# EAGLE board MEGA_BASED_WATER_ANALYZER (EAGLE 9.6.2)
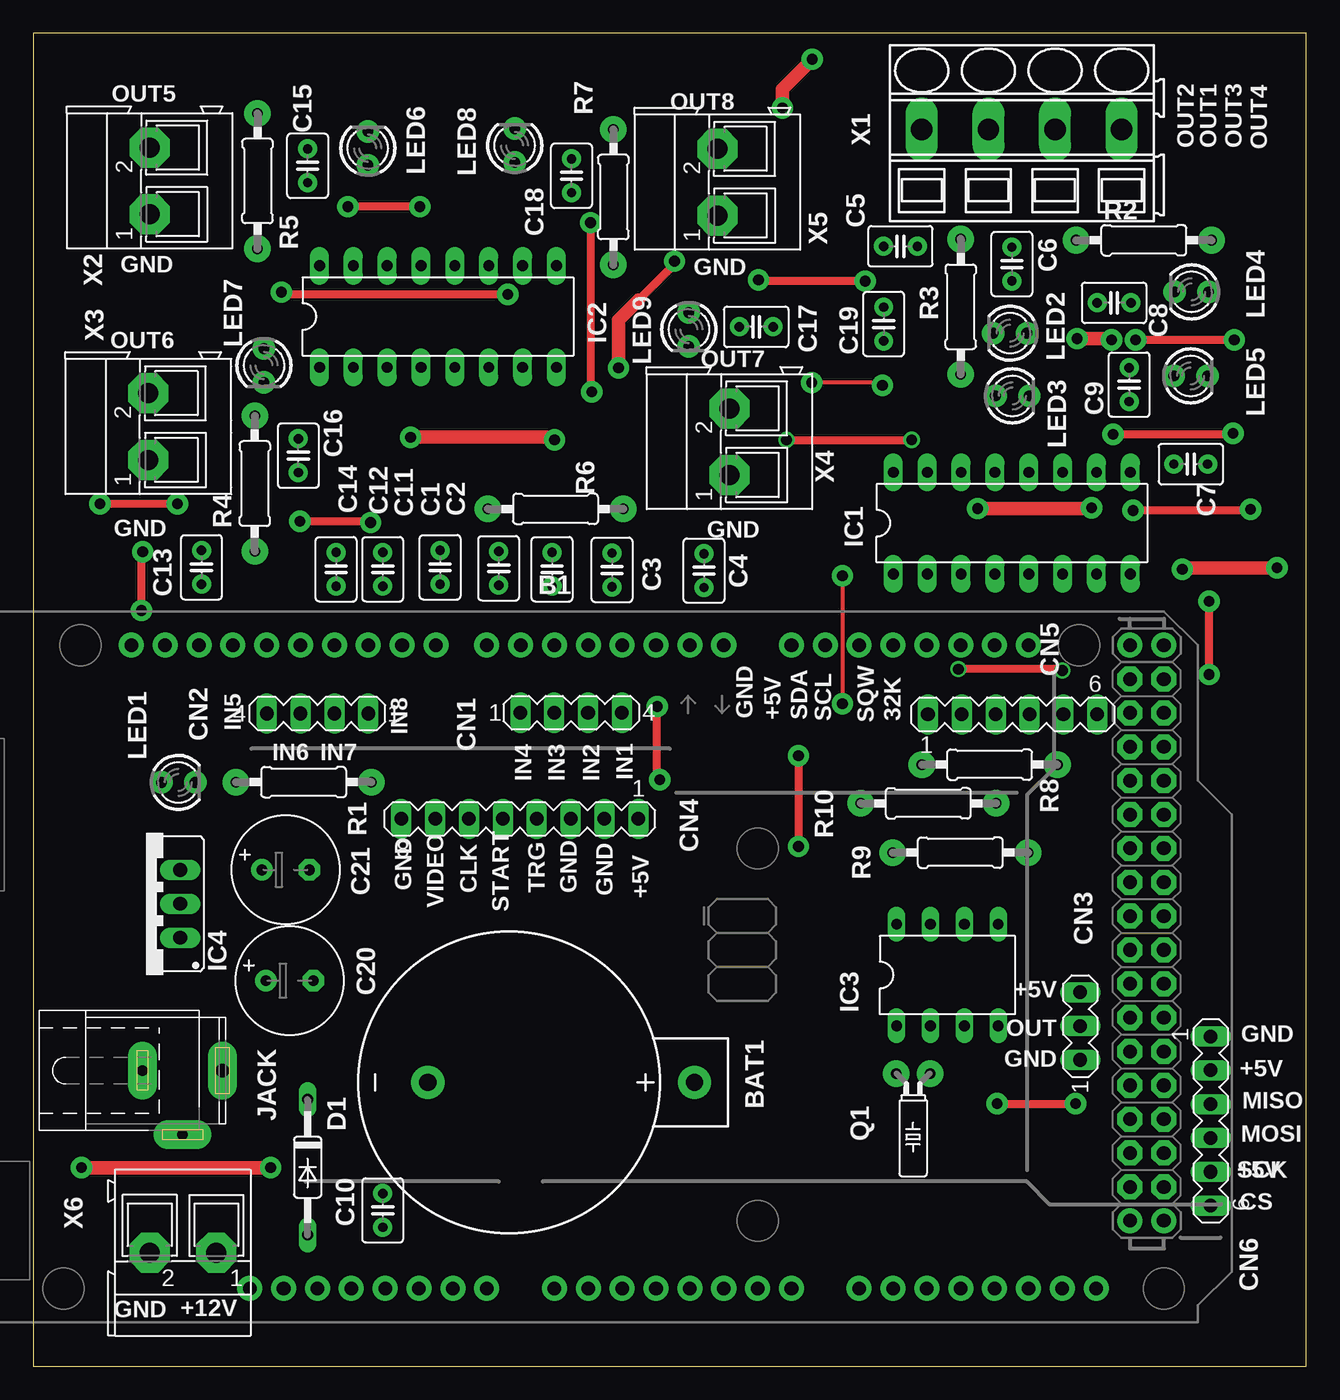
[diagram p0: board, top side]
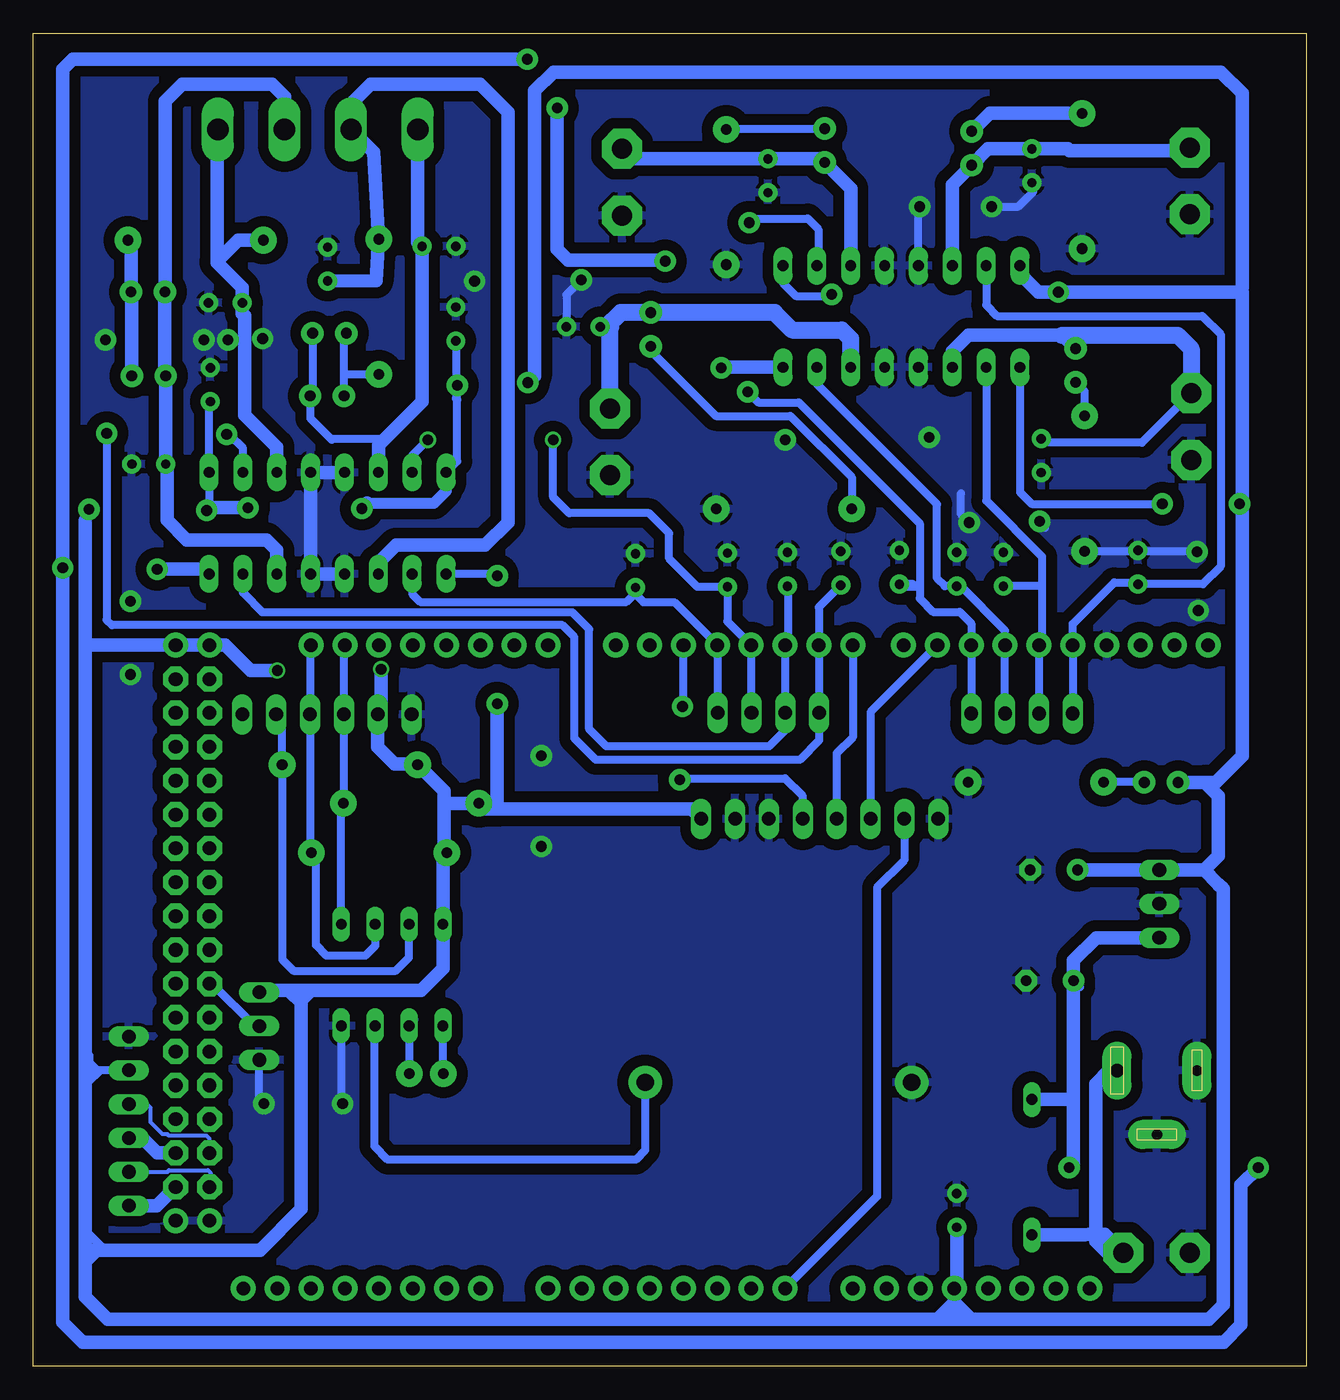
[diagram p1: board, bottom side, seen from below]

Size 95.5 x 100 mm. Coordinates in mm from the lower left corner, seen from the top.
Outline: 0,0 95.5,0 95.5,100 0,100 0,0
Copper layers (1*16): Top 0.035mm / dielectric 1.5mm / Bottom 0.035mm
Design rules "default": minimum track width 6mil, minimum drill 0.35mm, track to track 6mil, track to pad 6mil, pad to pad 6mil, via to via 6mil, smd to smd 6mil, copper to edge 40mil, drill to drill 6mil, minimum pad ring 10mil, minimum via ring 8mil, stop-mask expansion 4mil, vias tented up to drill 0mil, thermal gap 10mil

## Footprints (pad centres in the part's own frame; a part is rotated, then mirrored left to right if it is on the bottom)
ARDUINO_MEGA_NO_SILK = drill 1.016 pad 1.88: 0 13.97,24.13; 1 11.43,24.13; 2 8.89,24.13; 3 6.35,24.13; 3.3V -13.97,-24.13; 4 3.81,24.13; 5 1.27,24.13; 5V -11.43,-24.13; 5V@1 44.45,24.13; 5V@2 46.99,24.13; 6 -1.27,24.13; 7 -3.81,24.13; 8 -7.62,24.13; 9 -10.16,24.13; 10 -12.7,24.13; 11 -15.24,24.13; 12 -17.78,24.13; 13 -20.32,24.13; 14 19.05,24.13; 15 21.59,24.13; 16 24.13,24.13; 17 26.67,24.13; 18 29.21,24.13; 19 31.75,24.13; 20 34.29,24.13; 21 36.83,24.13; A0 1.27,-24.13; A1 3.81,-24.13; A2 6.35,-24.13; A3 8.89,-24.13; A4 11.43,-24.13; A5 13.97,-24.13; A6 16.51,-24.13; A7 19.05,-24.13; A8 24.13,-24.13; A9 26.67,-24.13; A10 29.21,-24.13; A11 31.75,-24.13; A12 34.29,-24.13; A13 36.83,-24.13; A14 39.37,-24.13; A15 41.91,-24.13; AREF -25.4,24.13; GND -8.89,-24.13; GND@1 -6.35,-24.13; GND@2 44.45,-19.05; GND@3 46.99,-19.05; GND@4 -22.86,24.13; IOREF -19.05,-24.13; NC -21.59,-24.13; RESET -16.51,-24.13; SCL -30.48,24.13; SDA -27.94,24.13; VIN -3.81,-24.13 | drill 1.016 pad 1.88 octagon: 22 44.45,21.59; 23 46.99,21.59; 24 44.45,19.05; 25 46.99,19.05; 26 44.45,16.51; 27 46.99,16.51; 28 44.45,13.97; 29 46.99,13.97; 30 44.45,11.43; 31 46.99,11.43; 32 44.45,8.89; 33 46.99,8.89; 34 44.45,6.35; 35 46.99,6.35; 36 44.45,3.81; 37 46.99,3.81; 38 44.45,1.27; 39 46.99,1.27; 40 44.45,-1.27; 41 46.99,-1.27; 42 44.45,-3.81; 43 46.99,-3.81; 44 44.45,-6.35; 45 46.99,-6.35; 46 44.45,-8.89; 47 46.99,-8.89; 48 44.45,-11.43; 49 46.99,-11.43; 50 44.45,-13.97; 51 46.99,-13.97; 52 44.45,-16.51; 53 46.99,-16.51
SN2032 = drill 1.3 pad 2.5: + 0,13.9; - 0,-6.1
C025-030X050 = drill 0.7 pad 1.422: 1 -1.27,0; 2 1.27,0
E3,5-8 = drill 0.813 pad 1.6: + -1.778,0 | drill 0.813 pad 1.6 octagon: - 1.778,0
MA04-1 = drill 1.016 long: 1 -3.81,0; 2 -1.27,0; 3 1.27,0; 4 3.81,0
MA03-1 = drill 1.016 long: 1 -2.54,0; 2 0,0; 3 2.54,0
MA08-1 = drill 1.016 long: 1 -8.89,0; 2 -6.35,0; 3 -3.81,0; 4 -1.27,0; 5 1.27,0; 6 3.81,0; 7 6.35,0; 8 8.89,0
MA06-1 = drill 1.016 long: 1 -6.35,0; 2 -3.81,0; 3 -1.27,0; 4 1.27,0; 5 3.81,0; 6 6.35,0
DO35-10 = drill 0.813 long: A 5.08,0; C -5.08,0
DIL16 = drill 0.813 pad 1.422 long: 1 -8.89,-3.81; 2 -6.35,-3.81; 3 -3.81,-3.81; 4 -1.27,-3.81; 5 1.27,-3.81; 6 3.81,-3.81; 7 6.35,-3.81; 8 8.89,-3.81; 9 8.89,3.81; 10 6.35,3.81; 11 3.81,3.81; 12 1.27,3.81; 13 -1.27,3.81; 14 -3.81,3.81; 15 -6.35,3.81; 16 -8.89,3.81
DIL08 = drill 0.813 long: 1 -3.81,-3.81; 2 -1.27,-3.81; 3 1.27,-3.81; 4 3.81,-3.81; 5 3.81,3.81; 6 1.27,3.81; 7 -1.27,3.81; 8 -3.81,3.81
78XXS = drill 1.016 long: GND 0,-2.54; IN -2.54,-2.54; OUT 2.54,-2.54
SPC4077 = drill 0.8 pad 2.184 long: 1 -3,0; 2 0,-4.8 | drill 1 pad 2.184 long: 3 3,0
LED3MM = drill 0.813 pad 1.676: A -1.27,0; K 1.27,0
TC26H = drill 0.8 pad 2: 1 -1.27,0; 2 1.27,0
0207/10 = drill 0.8 pad 2: 1 -5.08,0; 2 5.08,0
SMKDSP_1,5/4 = drill 1.6 pad 1.8 long: 1 -2.5,0; 2 2.5,0; 3 7.5,0; 4 12.5,0
AK300/2 = drill 1.5 pad 3 octagon: 1 -2.515,0; 2 2.489,0

## Placement (x,y rotation side)
B1  ARDUINO_MEGA_R3FULL  [ARDUINO_MEGA_NO_SILK]  37.83,29.96 0 top
BAT1  coin cell 2032  [SN2032]  35.7,21.3 270 top
C1  0.01uf  [C025-030X050]  34.92,59.86 90 top
C2  0.01uf  [C025-030X050]  38.92,59.79 90 top
C3  0.01uf  [C025-030X050]  43.42,59.74 90 top
C4  0.01uf  [C025-030X050]  50.32,59.69 90 top
C5  0.01uf  [C025-030X050]  65.06,84.02 180 top
C6  0.01uf  [C025-030X050]  73.42,82.69 90 top
C7  0.01uf  [C025-030X050]  86.84,67.68 0 top
C8  0.01uf  [C025-030X050]  81.09,79.78 0 top
C9  0.01uf  [C025-030X050]  82.22,73.64 90 top
C10  0.01uf  [C025-030X050]  26.22,11.69 90 top
C11  0.01uf  [C025-030X050]  30.52,59.94 90 top
C12  0.01uf  [C025-030X050]  26.22,59.79 90 top
C13  0.01uf  [C025-030X050]  12.62,59.94 90 top
C14  0.01uf  [C025-030X050]  22.72,59.79 90 top
C15  0.01uf  [C025-030X050]  20.58,90.06 270 top
C16  0.01uf  [C025-030X050]  19.88,68.31 270 top
C17  0.01uf  [C025-030X050]  54.24,77.98 0 top
C18  0.01uf  [C025-030X050]  40.38,89.31 270 top
C19  0.01uf  [C025-030X050]  63.8,78.19 90 top
C20  33uf/50V  [E3,5-8]  19.23,28.93 0 top
C21  10uf/25V  [E3,5-8]  18.93,37.24 0 top
CN1  Male berg strip  [MA04-1]  40.35,49.03 0 top
CN2  Male berg strip  [MA04-1]  21.32,48.97 180 top
CN3  Female berg strip  [MA03-1]  78.55,25.52 90 top
CN4  female berg strip  [MA08-1]  36.5,41.06 180 top
CN5  Female berg strip  [MA06-1]  73.47,48.9 0 top
CN6  Female berg strip  [MA06-1]  88.34,18.39 270 top
D1  1N4446  [DO35-10]  20.58,14.93 270 top
IC1  L293E  [DIL16]  73.42,63.25 0 top
IC2  L293E  [DIL16]  30.36,78.75 0 top
IC3  DS1307  [DIL08]  68.58,29.35 0 top
IC4  IC7805  [78XXS]  8.48,34.69 90 top
JACK  DC jack  [SPC4077]  11.19,22.18 0 top
LED1  RED  [LED3MM]  10.88,43.8 0 top
LED2  RED  [LED3MM]  73.28,77.5 180 top
LED3  YELLOW  [LED3MM]  73.46,72.8 0 top
LED4  YELLOW  [LED3MM]  86.9,80.6 180 top
LED5  RED  [LED3MM]  86.84,74.3 0 top
LED6  BLUE  [LED3MM]  25.1,91.38 90 top
LED7  BLUE  [LED3MM]  17.3,75.08 270 top
LED8  GREEN  [LED3MM]  36.12,91.58 90 top
LED9  GREEN  [LED3MM]  49.18,77.78 270 top
Q1  32.786kHz  [TC26H]  66.01,21.96 180 top
R1  4.7K  [0207/10]  20.28,43.82 180 top
R2  10k  [0207/10]  83.32,84.48 0 top
R3  10k  [0207/10]  69.58,79.48 270 top
R4  10k  [0207/10]  16.62,66.22 90 top
R5  10k  [0207/10]  16.82,88.92 90 top
R6  10k  [0207/10]  39.18,64.32 180 top
R7  10k  [0207/10]  43.52,87.72 90 top
R8  10k  [0207/10]  71.75,45.13 0 top
R9  10k  [0207/10]  69.55,38.53 0 top
R10  10k  [0207/10]  67.15,42.23 0 top
X1  4Pin Screw Terminal  [SMKDSP_1,5/4]  69.16,92.8 0 top
X2  2 pin Screw Terminal  [AK300/2]  8.73,88.93 90 top
X3  2 Pin Screw Terminal  [AK300/2]  8.63,70.5 90 top
X4  2 Pin Screw Terminal  [AK300/2]  52.23,69.37 90 top
X5  2 Pin Screw Terminal  [AK300/2]  51.33,88.84 90 top
X6  2 pin Screw Terminal  [AK300/2]  11.22,8.52 180 top

## Library data of the parts
B1 = SparkFun-Boards
BAT1 = sn2032
C1-C19 R1-R10 = rcl
C20 C21 = rcl; SPICEPREFIX: C
CN1-CN6 = con-lstb; OC_FARNELL: unknown; OC_NEWARK: unknown
D1 = diode
IC1 IC2 = texas; MF: Arrow Electronics; MPN: L293E; OC_FARNELL: 1467711; OC_NEWARK: 89K0732
IC3 = ic-package
IC4 = v-reg
JACK = con-jack; OC_FARNELL: unknown; OC_NEWARK: unknown
LED1-LED9 = led
Q1 = crystal; OC_FARNELL: unknown; OC_NEWARK: unknown
X1 = con-phoenix-smkdsp; MF: FARNELL; MPN: 1733596; OC_FARNELL: 3041268; OC_NEWARK: 71C4131
X2-X6 = con-ptr500; OC_FARNELL: unknown; OC_NEWARK: unknown

## Nets
32K: CN5.6
+5V: B1.5V B1.5V@1 B1.5V@2 C9.1 C10.1 C19.1 C21.+ CN3.3 CN4.1 CN5.2 CN6.2 IC1.1 IC1.9 IC1.16 IC2.1 IC2.9 IC2.16 IC3.8 IC4.OUT LED1.A R8.1 R9.1 R10.1
+12V: C20.+ D1.C IC1.8 IC2.8 IC4.IN
CLK: B1.9 CN4.6
CS: B1.53 CN6.6
DGND: B1.GND B1.GND@2 B1.GND@3 B1.GND@4 BAT1.- C1.2 C2.2 C3.2 C4.2 C5.2 C6.2 C7.2 C8.2 C9.2 C10.2 C11.2 C12.2 C13.2 C14.2 C15.2 C16.2 C17.2 C18.2 C19.2 C20.- C21.- CN3.1 CN4.2 CN4.3 CN4.8 CN5.1 CN6.1 IC1.4 IC1.5 IC1.12 IC1.13 IC2.4 IC2.5 IC2.12 IC2.13 IC3.4 IC4.GND JACK.1 JACK.2 R1.1 R4.1 R5.1 R6.1 R7.1 X2.1 X3.1 X4.1 X5.1 X6.2
IN1: B1.3 C4.1 CN1.4 IC1.2
IN2: B1.4 C3.1 CN1.3 IC1.15
IN3: B1.5 C2.1 CN1.2 IC1.7
IN4: B1.6 C1.1 CN1.1 IC1.10
IN5: B1.13 C13.1 CN2.4 IC2.15
IN6: B1.12 C14.1 CN2.3 IC2.2
IN7: B1.11 C12.1 CN2.2 IC2.7
IN8: B1.10 C11.1 CN2.1 IC2.10
IN+: D1.A JACK.3 X6.1
MISO: B1.50 CN6.3
MOSI: B1.51 CN6.4
N$1: IC3.1 Q1.2
N$2: IC3.2 Q1.1
N$3: C6.1 IC1.3 R3.1 X1.2
N$5: BAT1.+ IC3.3
N$8: C8.1 IC1.11 R2.1 X1.4
N$11: LED1.K R1.2
N$12: LED4.A LED5.K R2.2
N$13: LED2.K LED3.A R3.2
N$14: C7.1 IC1.6 LED4.K LED5.A X1.3
N$17: C16.1 IC2.3 LED7.A X3.2
N$20: C18.1 IC2.11 LED8.A X5.2
N$22: LED7.K R4.2
N$23: LED6.K R5.2
N$24: C17.1 IC2.6 LED9.A X4.2
N$25: C15.1 IC2.14 LED6.A X2.2
N$27: LED9.K R6.2
N$29: LED8.K R7.2
N$31: C5.1 IC1.14 LED2.A LED3.K X1.1
OUT: B1.40 CN3.2
SCK: B1.52 CN6.5
SCL: B1.21 CN5.4 IC3.6 R9.2
SDA: B1.20 CN5.3 IC3.5 R10.2
SQW: CN5.5 IC3.7 R8.2
START: B1.7 CN4.5
TRG: B1.2 CN4.4
VIDEO: B1.A0 CN4.7

## Tracks (layer width: path | path; a pad name or v marks a point on that pad's centre or on a via)
+5V  (via drill 0.8, 0.8 pad 1.6)
  Top 0.305: 60.7,59.4 v60.7,59.3 v60.7,49.7 | v63.7,73.6 63.5,73.8 v58.4,73.8
  Top 0.61: v10.8,64.7 v5,64.7 | v77.2,52.2 77.1,52.3 v69.4,52.3 | 79.35,64.35 v79.4,64.4 | v35.6,80.4 18.78,80.4 v18.6,80.58 | v82.5,64.2 91.22,64.2 v91.32,64.3
  Top 1.016: v70.85,64.35 79.35,64.35
  Bottom 0.305: 63.7,72.5 v63.7,73.6
  Bottom 0.61: C21.+ | 6.62,36.2 6.62,36.3 | 64.77,38.23 R9.1 64.7,38.76 | 21.47,81.96 IC2.16 21.56,82.47 | IC2.1 21.47,65.57 20.6,64.7 v10.8,64.7 | CN6.2 90.5,22.2 | 90.5,22.2 90.7,22.2 | 90.7,22.2 91.6,22.2 | 75.4,27.9 75.7,28.2 | 79.1,28.2 78.96,28.06 CN3.3 | R8.1 66.74,45.2 | 91.31,54.09 91.6,53.8 | v63.7,73.6 63.7,67.89 IC1.16 64.53,65.67 | C19.1 63.8,72.6 63.7,72.5 | 69.4,49.16 CN5.2 | IC1.9 82.31,64.4 | IC2.9 39.25,81.25 38.3,80.3 35.7,80.3 v35.6,80.4 | IC1.9 82.31,71.7 82.37,72.22 C9.1 | 64.7,42.3 64.63,42.23 | 60.7,41.9 60.6,41.8 | IC1.1 60.84,59.44 v60.7,59.3 | IC1.9 82.31,64.39 v82.5,64.2 | 91.6,63.46 91.32,63.74 v91.32,64.3 | 91.5,7.7 90.5,8.7 90.3,8.7 | 76.4,28.2 76.4,28 75.5,27.1 | 75.4,27.2 74.4,28.2 73.8,28.2 | 91.3,23.3 91.3,22.8 90.7,22.2 | 91.4,21.3 90.5,22.2 | 28.5,3.52 24.5,3.52
  Bottom 0.813: 70.45,64.75 65.45,64.75 64.53,65.67
  Bottom 1.016: C21.+ IC4.OUT 7.65,37.23 | 7.65,37.23 6.62,36.2 6.22,35.8 6.22,4.6 7.3,3.52 24.5,3.52 26.3,3.52 | B1.5V 26.4,3.52 28.5,3.52 89.9,3.52 91.6,5.22 91.6,8.7 | 64.77,38.23 IC3.8 64.77,29.83 66.4,28.2 73.8,28.2 75.7,28.2 76.4,28.2 79.1,28.2 | R8.1 64.7,43.16 64.7,42.3 64.7,38.76 | 91.6,63.46 91.6,53.8 91.6,22.2 91.6,8.7 | 21.47,81.96 20.09,80.58 v18.6,80.58 4.8,80.58 4.8,64.9 v5,64.7 4.8,64.5 4.8,45.8 6.8,43.8 7.6,43.8 | 91.6,8.7 90.3,8.7 78.5,8.7 75.4,11.8 75.4,27.2 75.4,27.9 | CN4.1 46.13,41.8 60.6,41.8 61.64,41.8 R10.1 64.63,42.23 | 66.74,45.2 68.4,45.2 69.66,46.46 CN5.2 | 91.31,54.09 B1.5V@2 B1.5V@1 81.09,54.09 79.2,52.2 v77.2,52.2 | 4.8,80.9 4.8,95.5 6.4,97.1 56.49,97.1 57.9,95.69 57.9,74.3 v58.4,73.8 | v69.4,52.3 69.4,49.16 | 70.45,64.75 v70.85,64.35 | 82.31,64.4 v79.4,64.4 | v60.7,49.7 60.7,41.9 | 26.4,4.8 25.2,3.6 | B1.5V 26.4,4.8 | 27.6,3.6 26.4,4.8 | B1.5V 26.22,6.01 C10.1 | LED1.A 7.6,43.8 | 7.65,37.23 6.6,38.28 6.6,42.8 7.6,43.8
+12V  (via drill 0.8 pad 1.6)
  Top 0.61: 45.4,80 48.1,82.7
  Top 1.016: v17.8,14.9 v3.6,14.9 | v93.3,59.9 86.3,59.9 v86.2,59.8 | v43.9,74.9 43.9,78.5 45.4,80 | 48.1,82.7 v48.1,82.9 | v56.2,94.4 56.2,95.82 v58.44,98.06
  Bottom 0.61: C20.+ 16.96,28.44
  Bottom 1.016: 11.2,31.97 IC4.IN 15.75,32.15 17.45,30.45 C20.+ 17.45,20.1 | v3.6,14.9 4.9,13.6 4.9,3.1 6.2,1.8 91.8,1.8 93.3,3.3 v93.3,59.9 93.3,97.3 92.54,98.06 v58.44,98.06 | v86.2,59.8 82.67,59.8 IC1.8 | IC2.8 43.74,74.94 43.8,75 v43.9,74.9 | v48.1,82.9 48.2,83 55.4,83 56.2,83.8 v56.2,94.4 | 17.45,20.1 17.45,15.25 v17.8,14.9 | D1.C 17.54,20.01 17.45,20.1
CLK
  Bottom 0.61: B1.9 32.69,49.07 CN4.6
CS
  Bottom 1.016: B1.53 86.23,12.04 CN6.6
DGND  (via drill 0.8 pad 1.6)
  Top 0.61: v8.2,61.1 8.1,61 v8.1,56.7 | v29,87 v23.6,87 | v62.4,81.4 54.5,81.4 v54.4,81.5 | v88.2,57.4 v88.2,51.9 | v90.1,77 v82.7,77 | v57.4,45.8 v57.4,39 | v20,63.4 25.2,63.4 v25.3,63.3 | v72.3,19.7 v78.2,19.7
  Top 1.016: v78.3,77.1 80.8,77.1 v80.9,77 | v28.3,69.7 38.9,69.7 v39.1,69.5
  Bottom 0.61: R4.1 8.2,61.14 v8.2,61.1 | IC2.13 29.09,86.91 v29,87 | v23.6,87 21.6,87 20.5,88.1 20.5,88.71 C15.2 | v54.4,81.5 55.51,80.39 C17.2 | v25.3,63.3 25.9,63.9 25.9,65.5 | v20,63.4 19.6,63 19.6,62.9 | IC3.4 72.39,19.79 v72.3,19.7 | v78.2,19.7 78.55,20.05 CN3.1
  Bottom 1.016: IC1.13 IC1.12 IC1.5 IC1.4
  pour Bottom (isolate 0.813): -0.3,100.3 97,100.3 97,-0.5 -0.3,-0.5
IN1
  Bottom 0.61: CN1.4 44.16,54.07 B1.3 47.41,57.32 49.72,57.32 50.32,57.92 C4.1 50.32,58.02 51,57.34 66.47,57.34 67.07,57.94 IC1.2
IN2  (via drill 0.8)
  Top 0.61: v56.5,69.5 v65.9,69.5
  Bottom 0.61: CN1.3 41.64,49.03 B1.4 43.42,55.87 C3.1 45.67,58.47 47.8,60.6 47.8,62.5 49.3,64 55.3,64 56.5,65.2 v56.5,69.5 56.4,69.4 | IC1.15 67.07,68.33 v65.9,69.5
IN3
  Bottom 0.61: IC1.7 79.77,58.03 78.3,56.56 55.06,56.56 53.8,55.3 53.8,47.8 52.5,46.5 40.3,46.5 39.1,47.7 39.1,49.01 CN1.2 39.1,49.05 B1.5 38.9,54.29 38.9,58.5 C2.1
IN4  (via drill 0.8 pad 1.6)
  Top 0.61: v90,70 89.9,69.9 v81,69.9
  Bottom 0.61: C1.1 36.56,56.95 B1.6 36.56,49.05 CN1.1 36.54,46.96 38,45.5 53.3,45.5 54.9,47.1 54.9,54.7 55.8,55.6 89.6,55.6 90,56 v90,70 | IC1.10 79.77,68.87 80.8,69.9 v81,69.9
IN5
  Bottom 0.61: IC2.15 24.01,79.61 23.2,78.8 7.8,78.8 6.42,77.42 6.42,60 7.75,58.67 C13.1 | 12.35,58.4 C13.1 | C13.1 12.75,58.8 14.4,58.8 17.51,55.69 B1.13 CN2.4 17.51,48.79 17.6,48.7
IN6
  Bottom 0.61: IC2.2 24.01,64.93 19.8,60.72 19.8,58.52 | 19.8,58.52 C14.1 | 19.8,58.52 19.8,54.34 B1.12 CN2.3
IN7
  Bottom 0.61: IC2.7 36.71,73.69 27.7,64.68 27.7,59.1 27.12,58.52 C12.1 25.92,58.52 22.59,55.19 B1.11 CN2.2
IN8  (via drill 0.8 pad 1.6)
  Top 0.61: v41.8,85.8 41.8,73.2 v41.9,73.1
  Bottom 0.61: v41.9,73.1 41.1,72.3 38.07,72.3 29,63.23 29,58.5 | v41.8,85.8 41.5,86.1 37.4,86.1 36.6,85.3 36.6,82.67 IC2.10 | B1.10 CN2.1 | B1.10 25.13,54.33 | 29.47,58.67 C11.1 30.35,58.5 29,58.5 | 29,58.5 29,57.6 28,56.6 26,56.6 25.13,55.73 B1.10
IN+
  Bottom 0.61: 16.3,9.88 16.27,9.85 | 16.27,9.85 14.31,7.89 14.31,7.95 X6.1 | 16.27,9.85 16.6,9.85 | JACK.3 14.19,20.51
  Bottom 1.016: JACK.3 14.82,22.18 15.8,21.2 15.8,9.38 14.31,7.89 | 16.3,9.88 15.1,9.88 X6.1 | 16.6,9.85 D1.A
MISO
  Bottom 0.305: B1.50 82.28,17.07 82.5,17.29 85.34,17.29 85.45,17.4 85.8,17.4 86.7,18.3 86.7,19.4 86.96,19.66 CN6.3
MOSI
  Bottom 1.016: B1.51 86.19,15.99 87.32,17.12 CN6.4
N$1
  Bottom 0.61: Q1.2 64.74,25.51 IC3.1
N$2
  Bottom 0.61: Q1.1 67.28,24.9 | 67.28,24.9 67.28,25.62 66.9,26 | IC3.2 67.31,24.93 67.28,24.9
N$3
  Bottom 1.016: C6.1 69.8,81.44 R3.1 69.96,91.1 X1.2 71.66,94.72 70.2,96.18 62,96.18 59.9,94.08 59.9,63.3 61.6,61.6 68.3,61.6 69.61,60.29 IC1.3
N$4
  Bottom 0.61: 91.4,10.3 91.4,10 90.4,9
N$5
  Bottom 0.61: IC3.3 69.9,25.49 69.9,16.5 68.9,15.5 50.3,15.5 49.6,16.2 BAT1.+
N$8
  Bottom 1.016: IC1.11 77.23,68.96 79.63,71.36 79.63,78.81 79.8,78.98 79.82,78.98 C8.1 79.82,80.9 81.72,82.8 81.72,82.9 | X1.4 81.72,92.74 81.72,82.9 | R2.1 80.14,84.48 81.72,82.9
N$11
  Bottom 0.61: R1.2 12.16,43.82 LED1.K
N$12
  Bottom 1.016: LED5.K 88.11,80.54 LED4.A 88.17,84.25 R2.2
N$13
  Bottom 0.61: 69.58,75.07 R3.2 71.99,74.4 72.19,74.6 | LED3.A 72.19,74.6 | 72.19,74.6 72.19,77.32 LED2.K
N$14
  Bottom 1.016: X1.3 76.66,95.24 77.6,96.18 84.32,96.18 85.6,94.9 85.6,80.63 LED4.K 85.63,74.36 LED5.A C7.1 85.47,67.78 85.47,63.47 84,62 78,62 77.23,61.23 IC1.6
N$17
  Bottom 0.61: X3.2 12.33,69.29 19.59,69.29 C16.1
  Bottom 1.016: LED7.A 18.3,77.35 25.35,77.35 26.55,76.15 IC2.3
  Bottom 1.27: 18.3,77.35 9.65,77.35 8.63,76.33 X3.2
N$20
  Bottom 1.016: IC2.11 34.17,88.36 LED8.A 36.39,90.58 C18.1 50.58,90.58 X5.2
N$22
  Bottom 0.61: R4.2 16.62,73.13 LED7.K
N$23
  Bottom 1.016: R5.2 23.75,94 LED6.K
N$24
  Bottom 1.27: IC2.6 34.17,77.07 34.85,77.75 38.58,77.75 39.88,79.05 LED9.A 51.41,79.05 52.48,77.98 C17.1 52.18,77.98 52.23,77.93 X4.2
N$25
  Bottom 1.016: X2.2 8.51,91.2 | 8.51,91.2 8,91.2 | 8.51,91.2 17.77,91.2 17.9,91.33 C15.1 23.88,91.33 LED6.A 26.55,88.66 IC2.14
N$27
  Bottom 0.61: LED9.K 49.18,76.18 44.3,71.3 38.7,71.3 34.1,66.7 R6.2
N$29
  Bottom 0.61: LED8.K 43.47,92.85 R7.2
N$31
  Bottom 0.61: LED2.A 74.55,72.98 LED3.K 74.73,71.13 73.2,69.6 | 73.2,69.6 73.1,69.5 | 73.2,69.6 69.1,69.6 68.95,69.75
  Bottom 1.016: C5.1 66.36,84.05 | C5.1 66.31,84 | IC1.14 69.61,69.09 68.95,69.75 66.33,72.37 C5.1 | X1.1 66.66,84.35 C5.1
OUT
  Bottom 0.61: B1.40 82.08,28.69 78.91,25.52 CN3.2
SCK
  Bottom 0.305: CN6.5 85.45,14.58 85.34,14.7 82.39,14.7 82.2,14.5 82.2,13.53 B1.52
SCL
  Bottom 0.61: IC3.6 69.85,31.55 70.6,30.8 73.5,30.8 74.3,31.6 74.3,38.2 R9.2 74.74,38.64 CN5.4 74.74,54.01 B1.21
SDA
  Bottom 0.61: IC3.5 72.39,42.07 R10.2 72.2,42.26 CN5.3 72.2,54.01 B1.20
SQW
  Bottom 0.61: IC3.7 67.31,30.66 68.31,29.66 75.98,29.66 76.83,30.51 R8.2 76.83,48.45 CN5.5
START
  Bottom 0.61: B1.7 34.02,47.18 35.23,45.97 CN4.5
TRG  (via drill 0.8 pad 1.6)
  Top 0.61: v47,44 46.8,44.2 v46.8,49.5
  Bottom 0.61: CN4.4 37.77,42.77 39.1,44.1 46.9,44.1 v47,44 | v46.8,49.5 46.72,49.58 B1.2
VIDEO
  Bottom 0.61: CN4.7 30.15,37.96 32.2,35.91 32.2,12.73 B1.A0

## Text on the board
tPlace: OUT5 | OUT8 | OUT2 | OUT1 | OUT3 | OUT4 | GND | GND | OUT6 | OUT7 | GND | GND | GND | IN5 | +5V | SDA | SCL | SQW | 32K | IN6 | IN7 | IN8 | IN4 | IN3 | IN2 | IN1 | GND | CLK | TRG | GND | GND | +5V | VIDEO | START | +5V | OUT | GND | GND | +5V | MISO | MOSI | +5V | SCK | CS | GND | +12V